# EAGLE board Bullseye_Calibrator_SMD (EAGLE 7.7.0)
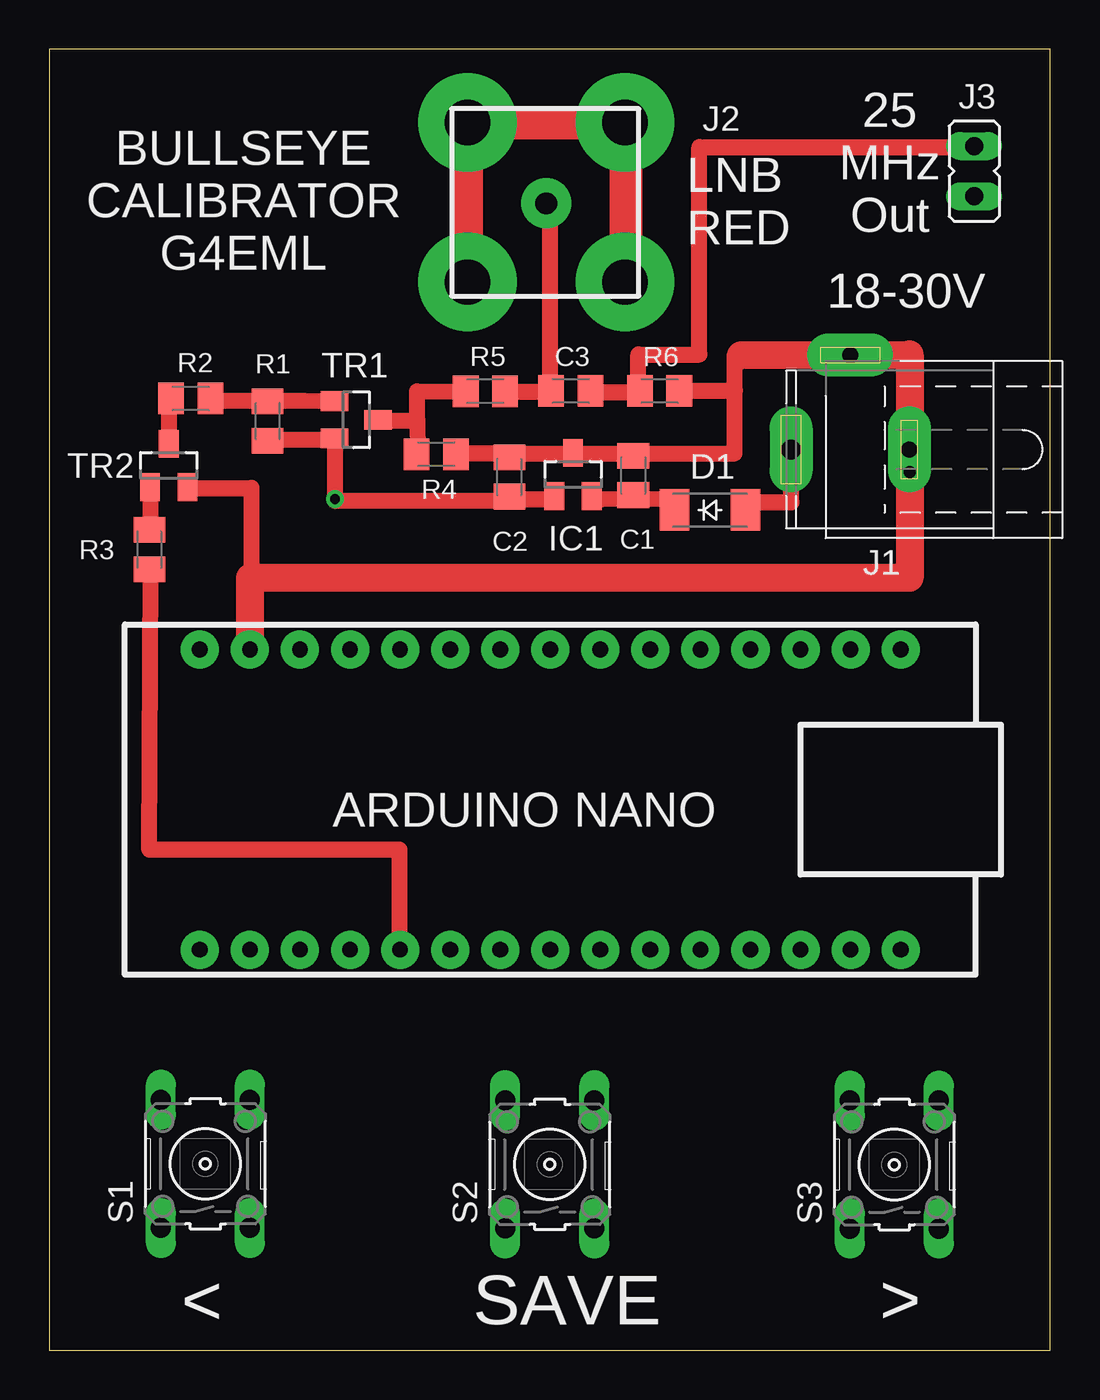
[diagram p0: board, top side]
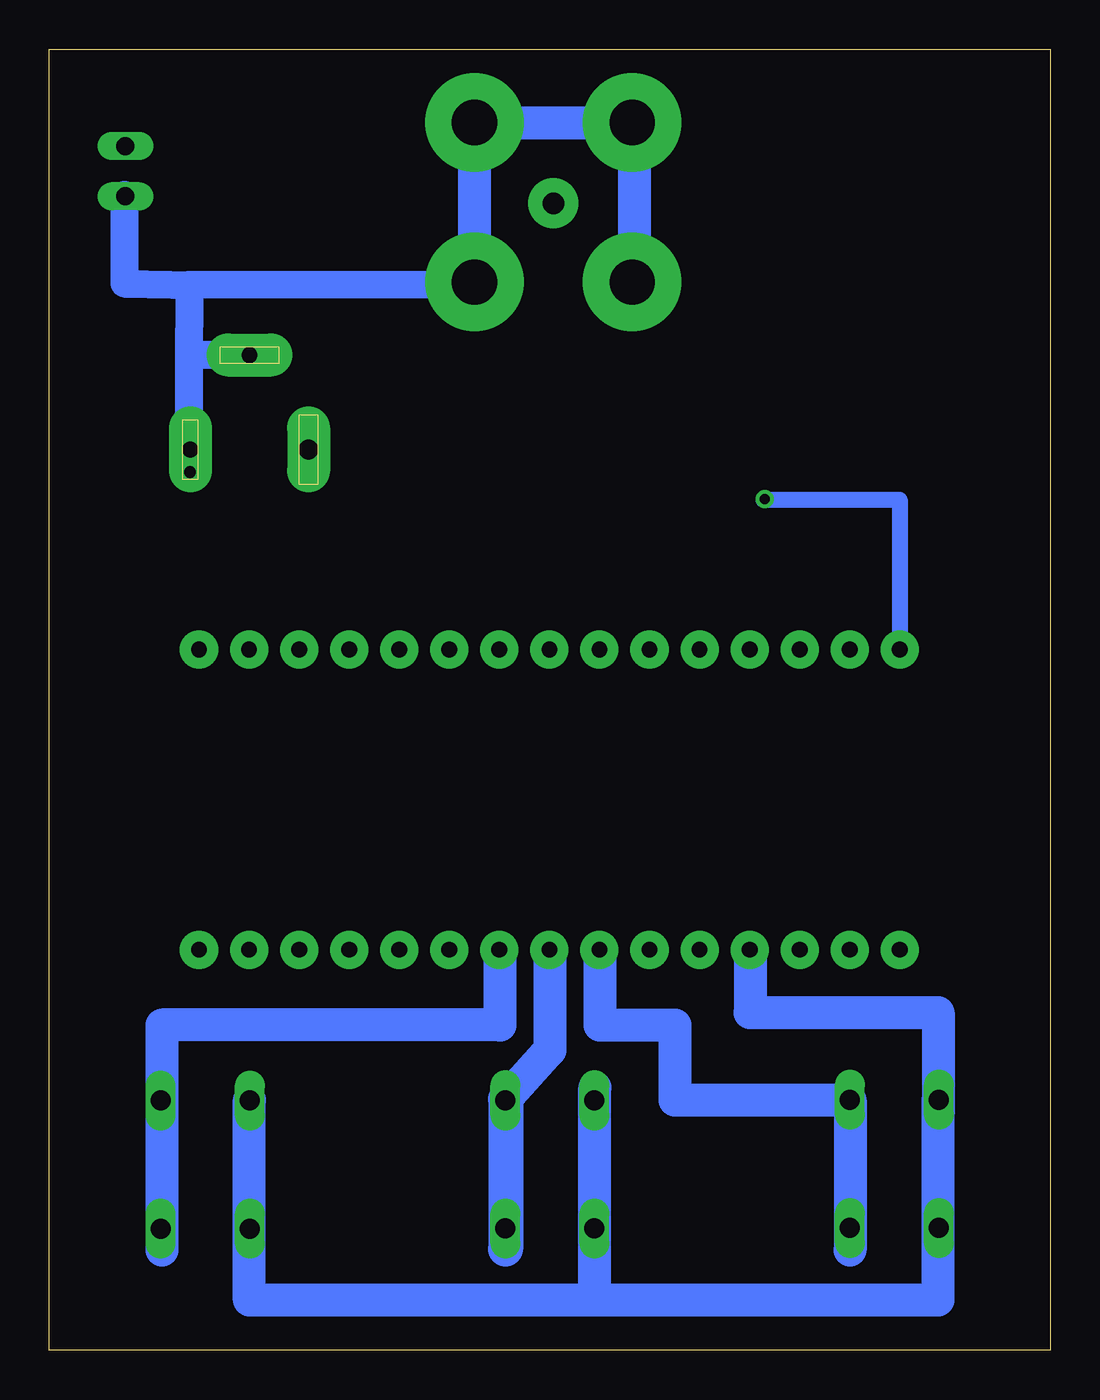
[diagram p1: board, bottom side, seen from below]

Size 50.8 x 66.04 mm. Coordinates in mm from the lower left corner, seen from the top.
Outline: 0,66.04 0,0 50.8,0 50.8,66.04 0,66.04
Copper layers (1*16): Top 0.035mm / dielectric 1.5mm / Bottom 0.035mm
Design rules "default": minimum track width 10mil, minimum drill 24mil, track to track 8mil, track to pad 8mil, pad to pad 8mil, via to via 8mil, smd to smd 8mil, copper to edge 40mil, drill to drill 8mil, minimum pad ring 10mil, minimum via ring 8mil, stop-mask expansion 4mil, vias tented up to drill 0mil, thermal gap 10mil

## Footprints (pad centres in the part's own frame; a part is rotated, then mirrored left to right if it is on the bottom)
C0805K = smd 1.3 x 1.6: 1 -1,0; 2 1,0
SOD-123_MINI-SMA = smd 1.5 x 2.1: A 1.8,0; C -1.8,0
SOT23 = smd 1 x 1.4: 1 -0.95,-1.1; 2 0.95,-1.1; 3 0,1.1
SPC4077 = drill 0.8 pad 2.184 long: 1 -3,0; 2 0,-4.8 | drill 1 pad 2.184 long: 3 3,0
JP1 = drill 0.914 long: 1 0,-1.27; 2 0,1.27
B3F-10XX = drill 1.016 long: 1 -3.251,2.261; 2 3.251,2.261; 3 -3.251,-2.261; 4 3.251,-2.261

## Placement (x,y rotation side)
C1  [C0805K]  29.63,44.41 90 top
C2  [C0805K]  23.34,44.33 90 top
C3  [C0805K]  26.46,48.7 0 top
D1  [SOD-123_MINI-SMA]  33.53,42.65 0 top
IC1  [SOT23]  26.58,44.46 0 top
J1  [SPC4077]  40.64,45.72 180 top
J3  [JP1]  46.93,59.85 0 top
R1  [C0805K]  11.08,47.16 90 top
R2  [C0805K]  7.18,48.31 0 top
R3  [C0805K]  5.08,40.64 90 top
R4  [C0805K]  19.64,45.48 180 top
R5  [C0805K]  22.13,48.68 0 top
R6  [C0805K]  30.97,48.69 0 top
S1  [B3F-10XX]  7.92,9.46 90 top
S2  [B3F-10XX]  25.4,9.43 90 top
S3  [B3F-10XX]  42.89,9.42 90 top
TR1  [SOT23]  15.58,47.23 270 top
TR2  [SOT23]  6.06,44.91 0 top

## Library data of the parts
C1-C3 R1-R6 = resistor
D1 = diode
IC1 TR1 TR2 = avago
J1 = con-jack
J3 = jumper
S1-S3 = switch-omron

## Tracks (layer width: path | path; a pad name or v marks a point on that pad's centre or on a via)
R3
  Top 0.813: 17.78,20.32 17.78,25.4 5.08,25.4 5.15,39.54
S$1  (via drill 1.1 pad 2.54)
  other vias: 25.22,58.22
S$2  (via drill 0.8 pad 1.93)
  other vias: 43.2,35.57
S$3  (via drill 0.8 pad 1.93)
  other vias: 40.66,35.57
S$4  (via drill 0.8 pad 1.93)
  other vias: 38.12,35.57
S$5  (via drill 0.8 pad 1.93)
  other vias: 35.58,35.57
S$6  (via drill 0.8 pad 1.93)
  other vias: 33.04,35.57
S$7  (via drill 0.8 pad 1.93)
  other vias: 30.5,35.57
S$8  (via drill 0.8 pad 1.93)
  other vias: 27.96,35.57
S$9  (via drill 0.8 pad 1.93)
  other vias: 25.42,35.57
S$10  (via drill 0.8 pad 1.93)
  other vias: 22.88,35.57
S$11  (via drill 0.8 pad 1.93)
  other vias: 20.34,35.57
S$12  (via drill 0.8 pad 1.93)
  other vias: 17.8,35.57
S$13  (via drill 0.8 pad 1.93)
  other vias: 15.26,35.57
S$14  (via drill 0.8 pad 1.93)
  other vias: 12.72,35.57
S$15  (via drill 0.8 pad 1.93)
  other vias: 10.18,35.57
S$16  (via drill 0.8 pad 1.93)
  other vias: 7.64,35.57
S$17  (via drill 0.8 pad 1.93)
  other vias: 7.64,20.33
S$18  (via drill 0.8 pad 1.93)
  other vias: 10.18,20.33
S$19  (via drill 0.8 pad 1.93)
  other vias: 12.72,20.33
S$20  (via drill 0.8 pad 1.93)
  other vias: 15.26,20.33
S$21  (via drill 0.8 pad 1.93)
  other vias: 17.8,20.33
S$22  (via drill 0.8 pad 1.93)
  other vias: 20.34,20.33
S$23  (via drill 0.8 pad 1.93)
  other vias: 22.88,20.33
S$24  (via drill 0.8 pad 1.93)
  other vias: 25.42,20.33
S$25  (via drill 0.8 pad 1.93)
  other vias: 27.96,20.33
S$26  (via drill 0.8 pad 1.93)
  other vias: 30.5,20.33
S$27  (via drill 0.8 pad 1.93)
  other vias: 33.04,20.33
S$28  (via drill 0.8 pad 1.93)
  other vias: 35.58,20.33
S$29  (via drill 0.8 pad 1.93)
  other vias: 38.12,20.33
S$30  (via drill 0.8 pad 1.93)
  other vias: 40.66,20.33
S$31  (via drill 0.8 pad 1.93)
  other vias: 43.2,20.33
S$32
  Bottom 1.676: 5.71,12.7 5.71,2.54 23.11,2.54 | 23.11,2.54 23.11,13.34 | 23.11,2.54 40.64,2.54 40.64,12.7
S$33
  Bottom 1.676: 15.24,20.32 15.24,17.14 5.7,17.14 5.7,11.97
S$34
  Top 0.813: 5.12,43.91 5.12,41.74
S$35  (via drill 2.3 pad 5)
  other vias: 29.22,54.22
S$36  (via drill 2.3 pad 5)
  other vias: 29.22,62.32
S$37  (via drill 2.3 pad 5)
  other vias: 21.22,54.22
S$38  (via drill 2.3 pad 5)
  other vias: 21.22,62.32
S$39
  Bottom 1.676: 22.86,20.32 22.86,16.51 19.05,16.51 19.05,12.7 10.16,12.7 10.16,5.08
S$40
  Bottom 1.676: 25.4,20.32 25.4,15.24 27.65,12.75
  Bottom 1.778: 27.65,12.75 27.65,5.13
S$41
  Bottom 1.676: 27.94,20.32 27.94,16.51 45.09,16.51 45.09,5.08
S$42
  Bottom 1.778: 7.63,35.56 7.62,35.56
S$43
  Top 0.813: 26.56,45.53 34.77,45.53 34.77,46.84 34.77,50.48
S$44  (via drill 0.6)
  Top 1.422: 35.11,50.51 43.66,50.54 v43.66,44.58
  Bottom 1.778: v43.66,44.58 43.7,44.58
S$45
  Top 0.813: 31.91,43.2 27.94,43.18
S$46
  Top 1.422: 43.66,45.68 43.66,39.21 10.19,39.21 10.19,35.56
S$47
  Top 0.813: 26.64,45.49 23.22,45.49
S$48
  Top 0.813: 25.59,43.17 23.38,43.17 23.38,43.15
S$49
  Top 0.813: 7,43.77 10.25,43.77 10.25,38.98
S$50
  Top 0.813: 6.07,45.93 6.09,45.93 6.09,48.29
S$51
  Top 0.813: 8.22,48.2 12.95,48.2 14.53,48.18
S$52
  Top 0.813: 11.1,46.22 14.49,46.22 14.49,43.13 23.43,43.13 23.43,43.17
S$53
  Bottom 0.813: 14.57,43.17 7.65,43.17 7.65,35.48
S$54  (via drill 0.5)
  other vias: 14.5,43.2
S$55
  Top 0.813: 16.78,47.2 18.68,47.2 18.69,45.53
S$56
  Top 0.813: 23.23,45.51 23.43,45.51 23.37,45.25
S$57
  Bottom 1.422: 29.25,54.09 43.71,54.07 43.74,45.44
S$58
  Top 0.813: 24.15,45.51 20.99,45.51
S$59
  Top 0.813: 18.66,47.18 18.66,48.68 21,48.65
S$60
  Top 0.813: 23.18,48.61 23.18,48.66 25.38,48.66
S$61
  Top 0.813: 27.46,48.66 27.46,48.64 30.03,48.64
S$62
  Top 0.813: 31.99,48.71 31.99,48.72 34.79,48.72
S$63
  Top 0.813: 25.4,58.42 25.4,48.62
S$64
  Top 1.676: 21.18,54.16 21.18,62.43
S$65
  Bottom 1.676: 21.18,62.43 21.25,62.43 21.25,62.31
S$66
  Bottom 1.778: 10.19,35.56 10.16,35.56
S$67
  Top 1.676: 21.25,62.31 29.25,62.31 29.25,54.09
S$68
  Bottom 1.422: 40.65,50.51 43.72,50.51
S$69
  Bottom 1.422: 46.98,58.63 46.98,54.15 43.41,54.06
S$70
  Bottom 1.422: 21.12,54.12 21.14,54.12
  Bottom 1.676: 29.2,54.14 29.2,62.31 21.12,62.31 21.12,54.12
S$71
  Top 0.813: 29.89,48.64 29.89,50.55 32.98,50.55 32.98,61.07 47.11,61.07
S$72
  Top 0.813: 35.7,43.05 37.66,43.05 37.66,45.67

## Text on the board
tPlace: J2 | 25 / MHz / Out | BULLSEYE / CALIBRATOR / G4EML | LNB / RED | 18-30V | ARDUINO NANO | < | SAVE | >